# Altium PCB PCB_MicroBot Voltage Regulator V1.pcbdoc
Units mil, origin at the board's own origin, x right, y up, seen from the top; angles counter-clockwise.
Board outline 2029.19 x 3195.07 mil, 2 copper layers (Top Layer, Bottom Layer); 16 components, 16 nets, 37 pads, 0 vias.
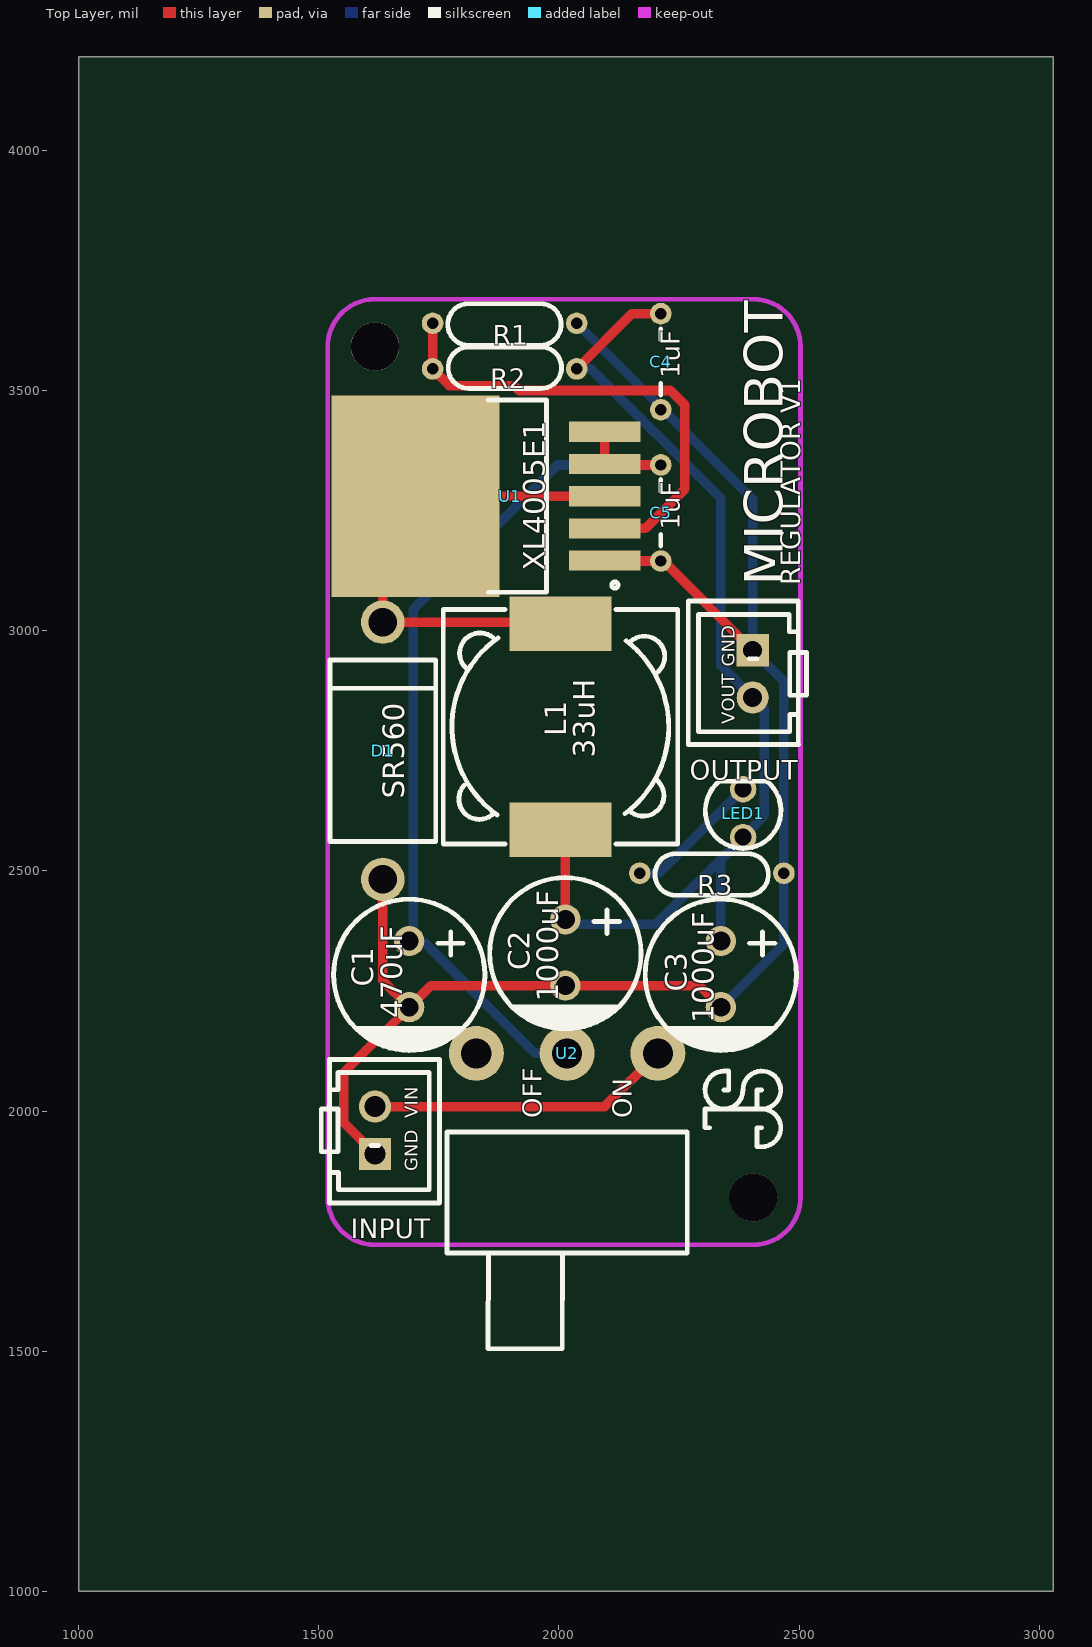
[diagram p0: Top Layer view]
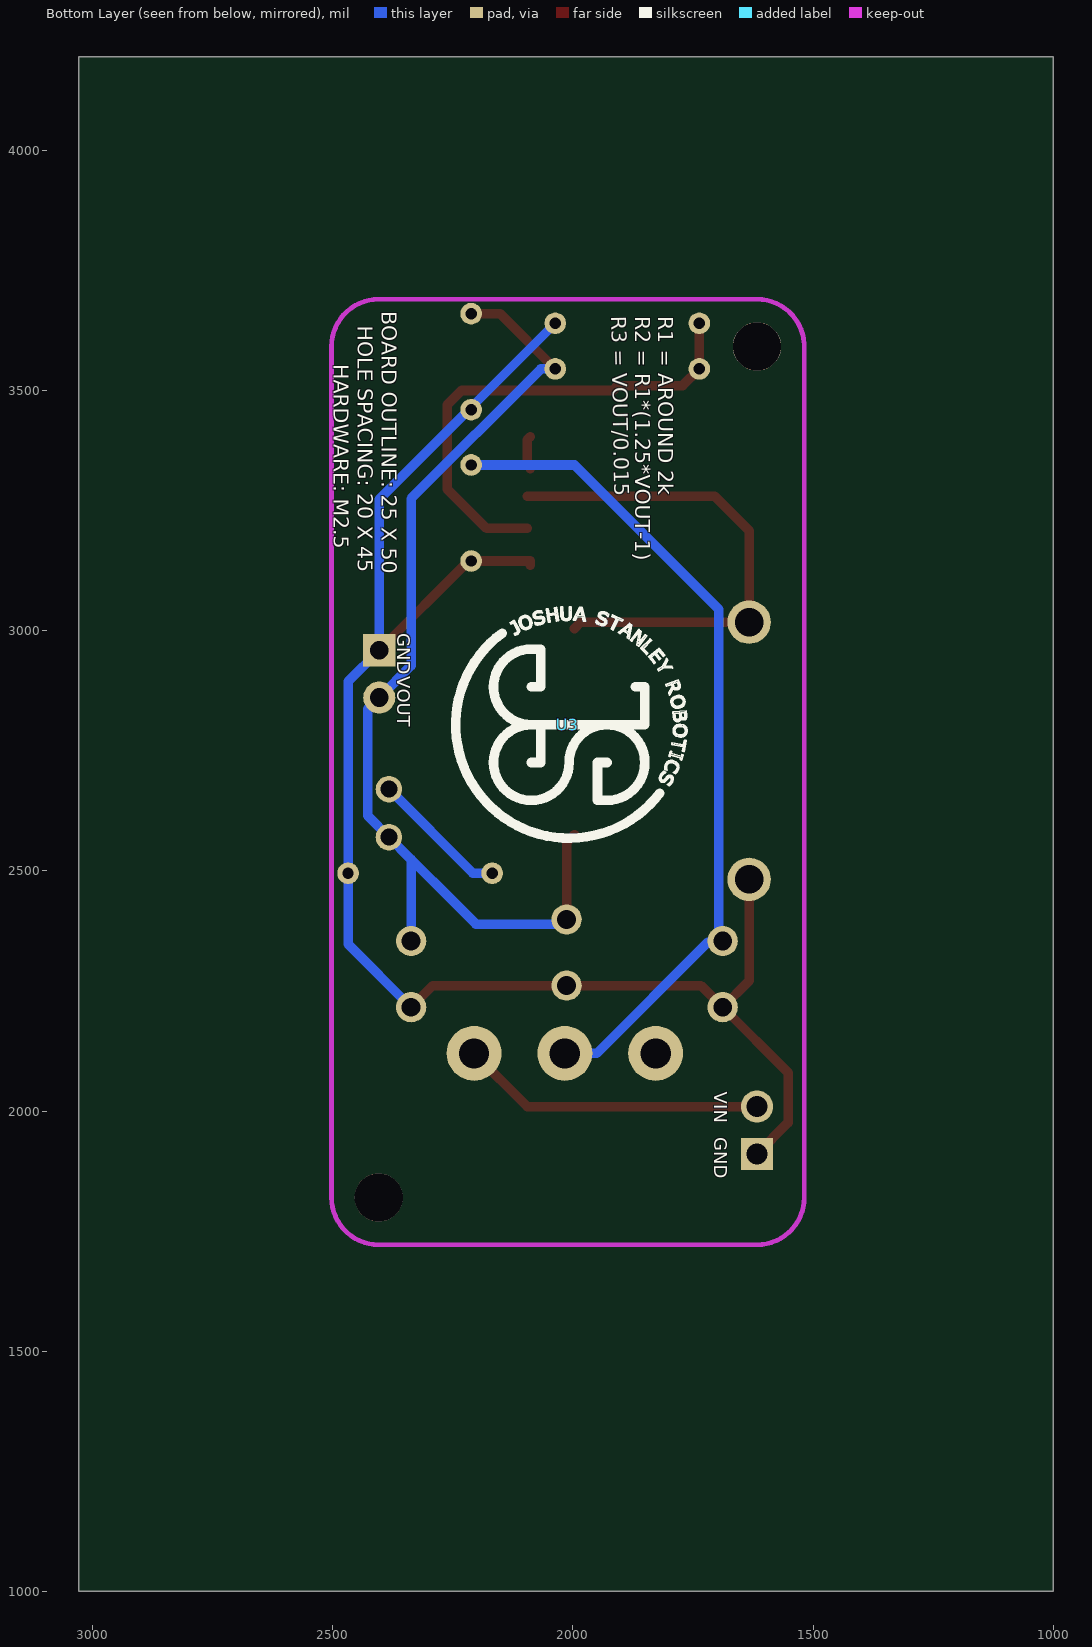
[diagram p1: Bottom Layer view, seen from below]

## Layer stack, top to bottom
Top Layer: signal copper (thickness not stored)
Dielectric: dielectric 12.6, FR-4, Dk 4.8
Bottom Layer: signal copper (thickness not stored)

## Board outline
3029.19,1000 1000,1000 1000,4195.07 3029.19,4195.07

## Components (designator, comment, footprint, x,y, rotation, side; value= is the part's Value field where it differs from the comment)
C1 "470uF" CAP-D8.0×F3.5 1688.27,2284.98 r270 top
C2 "1000uF" CAP-D8.0×F3.5 2013.27,2329.98 r270 top
C3 "1000uF" CAP-D8.0×F3.5 2336.95,2285 r270 top
C4 "1uF" "CERAMIC CAPACITOR" 2211.95,3660 r270 top
C5 "1uF" "CERAMIC CAPACITOR" 2211.95,3145 r90 top
D1 "SR560" DO-27_BD5.3-L8.4-P12.40-D1.3-R-RD 1633.25,2750 r270 top
INPUT "XHB-2A" CONN-TH_XHB-2A#1 1617,1960 r270 top
L1 "33uH" IND-SMD_L12.3-W12.3 2003.25,2800 r90 top
LED1 "LED-TH-3mm_R" LED-TH_BD3.0_RED 2383.25,2620 r180 top
OUTPUT "XHB-2A" CONN-TH_XHB-2A#2 2403.3,2910 r90 top
R1 "3K" "1/4W RESISTOR" 1736.95,3640 r0 top
R2 "16K" "1/4W RESISTOR" 2036.95,3545 r180 top
R3 "330" "1/4W RESISTOR" 2168.25,2495 r0 top
U1 "XL4005E1" TO-263-5_L10.2-W9.2-P1.70-TL 1898.25,3280 r180 top
U2 "SS12D10G5-WJ" SW-TH_3P-SS12D06-1 2016.95,2120 r0 top
U3 "Logo" LOGO 2010.65,2804.2 r90 bottom

## Footprints (in the part's own frame and the unit in brackets; to place one, negate y for a bottom-side part, rotate by r counter-clockwise, add the part's x,y. Pads: shape width x height; smd on the part's side, far side on the other; paste and mask are expansions set on the pad)
"1/4W RESISTOR" [mil]
  round 45 hole 23.62 paste+0 mask+2: 1(0,0) 2(300,0)
  silkscreen extent 32,-46 268,41
CAP-D8.0×F3.5 [mm]
  round 1.6 hole 1 paste+0 mask+0.102: 1(-1.75,0) 2(1.75,0)
  silkscreen extent -3.96,-4 4.04,4
"CERAMIC CAPACITOR" [mil]
  round 45 hole 23.62 paste+0 mask+2: 1(0,0) 2(200,0)
  silkscreen extent 32,0 170,0
CONN-TH_XHB-2A#1 [mm]
  rect 1.7x1.7 hole 1.1 paste+0 mask+0.051: 1(1.251,0)
  round 1.7 hole 1.1 paste+0 mask+0.051: 2(-1.251,0)
  silkscreen extent -3.75,-2.84 3.86,3.4
CONN-TH_XHB-2A#2 [mm]
  rect 1.7x1.7 hole 1 paste+0 mask+0.051: 1(1.251,0)
  round 1.7 hole 1 paste+0 mask+0.051: 2(-1.251,0)
  silkscreen extent -3.75,-2.84 3.86,3.4
DO-27_BD5.3-L8.4-P12.40-D1.3-R-RD [mm]
  round 2.3 hole 1.5 paste+0 mask+0.051: 1(6.8,0) 2(-6.8,0)
  silkscreen extent -4.8,-2.8 4.8,2.8
IND-SMD_L12.3-W12.3 [mm]
  rect 2.9x5.4 smd paste+0 mask+0.051: 1(-5.45,0) 2(5.45,0)
  silkscreen extent -6.2,-6.2 6.2,6.2
LED-TH_BD3.0_RED [mm]
  round 1.4 hole 0.9 paste+0 mask+0.051: 1(0,1.27) 2(0,-1.27)
  silkscreen extent -2,-1.69 2,1.87
LOGO [mil]
  silkscreen extent -236,-248 245,233
SW-TH_3P-SS12D06-1 [mm]
  round 2.9 hole 1.6 paste+0 mask+0.051: 1(-4.8,0) 2(0,0) 3(4.8,0)
  silkscreen extent -6.35,-15.62 6.35,-4.15
TO-263-5_L10.2-W9.2-P1.70-TL [mm]
  rect 3.8x1.069 smd paste+0 mask+0.051: 1(-5.003,3.404) 2(-5.003,1.702) 3(-5.003,0) 4(-5.003,-1.702) 5(-5.003,-3.404)
  rect 8.89x10.66 smd paste+0 mask+0.051: 6(5.002,0)
  silkscreen extent -5.7,-5.08 1.14,5.08

## Free pads (board coordinates)
  round 100.39 hole 100.39 unplated paste+0: ""(1616.95,3591.65) ""(2404.35,1820)

## Nets (pads, with @x,y where several pads share a name; then routed paths per layer and width w, separated by ;. In a path a pad name is that pad's centre, name@x,y a point inside that pad or via, vN(x,y) a via of type N, cw(c..) or ccw(c..) an arc to the next point about the centre after c; other vN are vias at no path point)
D1_2: D1.2 L1.2 U1.3 U1.6 | length 1051.3
  Top Layer w20: L1.2@1996.95,3004.57 1983.8,3017.72 D1.2 1633.25,3208.25 1695,3270 1705,3280 U1.3
GND: C1.2 C2.2 C3.2 C4.2 C5.1 D1.1 INPUT.1 OUTPUT.1 R1.2 R3.2 U1.1 | length 3420.8
  Top Layer w20: INPUT.1@1616.95,1910.7 1551.95,1975.7 1551.95,2079.75 C1.2 ; D1.1 1633.25,2271.1 1688.25,2216.1 1733.65,2261.1 C2.2@2013.25,2261.1 ; C2.2 2291.97,2261.07 C3.2 ; U1.1@2088.95,3136 2088.95,3145 C5.1 2217.55,3145 OUTPUT.1
  Bottom Layer w20: R1.2 2403.25,3273.7 2403.25,2959.3 2468.25,2894.3 R3.2 2468.25,2347.39 C3.2
INPUT_2: INPUT.2 U2.3 | length 634.9
  Top Layer w20: INPUT.2 2095.18,2009.25 U2.3
LED1_2: LED1.2 R3.1 | length 287.5
  Bottom Layer w20: R3.1 2208.25,2495 LED1.2
S$2410: 
S$2414: 
S$2418: 
S$2422: 
S$3064: 
S$3068: 
S$3072: 
S$3076: 
U1_2: R1.1 R2.2 U1.2 | length 1026.8
  Top Layer w20: R1.1 R2.2 1771.95,3510 1906.95,3510 1916.95,3500 2231.95,3500 2261.95,3470 2261.95,3295 2179.95,3213 U1.2
U2_1: U2.1
VIN: C1.1 C5.2 U1.4 U1.5 U2.2 | length 1949.4
  Top Layer w20: U1.5@2088.9,3404 2095.2,3397.7 U1.4 ; U1.4@2088.95,3337 2088.95,3345 C5.2
  Bottom Layer w20: U2.2 1950.55,2120 1718.85,2351.7 1688.25,2353.9 1696.95,2362.5 1696.95,3045 1996.95,3345 C5.2
VOUT: C2.1 C3.1 C4.1 L1.1 LED1.1 OUTPUT.2 R2.1 | length 2264.6
  Top Layer w20: L1.1@1996.95,2575.43 2013.27,2559.11 C2.1 ; R2.1 2151.95,3660 C4.1
  Bottom Layer w20: C2.1@2006.95,2388.9 2202.15,2388.9 LED1.1 ; R2.1 2066.95,3545 2336.95,3275 2336.95,2927.1 2403.25,2860.7 2426.95,2837.1 2426.95,2614.4 LED1.1 ; C3.1 2336.95,2523.7 LED1.1

## Keep-outs
Keep-Out Layer:
  lines w10 net S$2410: 1518.53,1820 ccw(c1616.95,1820) 1616.95,1721.58
  lines w10 net S$2414: 2404.35,1721.58 ccw(c2404.35,1820) 2502.78,1820
  lines w10 net S$2418: 2404.35,3690.08 cw(c2404.35,3591.65) 2502.78,3591.65
  lines w10 net S$2422: 1518.66,3586.5 cw(c1616.95,3591.65) 1616.95,3690.07

## Silkscreen, mask and mechanical layers (free items; w line width, h text height)
Top Overlay:
  lines w10: 2314,1965 2304.16,1965 2304.16,2004.37 2422.26,2004.37 ; 2343.53,2043.74 2353.37,2043.74 2353.37,2083.11 2343.53,2083.11 ccw(c2343.53,2043.74) 2382.89,2043.74 cw(c2422.26,2043.74) 2422.26,2004.37 ; 2412.43,2004.37 2412.43,2043.74 2422.26,2043.74 ; 2422.26,1965 2412.43,1965 2412.43,1925.63 2422.26,1925.63 ccw(c2422.26,1965) 2422.26,2004.37
  text "REGULATOR V1" at 2501.95,3095 h40 r90
  text "MICROBOT" at 2466.31,3093.31 h80 r90
  text "GND" at 2365.73,2925 h27.56 r90
  text "VOUT" at 2365.73,2805 h27.56 r90
  text "VIN" at 1705.73,1985 h27.56 r90
  text "OFF" at 1964.43,1985 h39.37 r90
  text "ON" at 2151.84,1985 h39.37 r90
  text "GND" at 1705.73,1875 h27.56 r90
Bottom Overlay:
  text "BOARD OUTLINE: 25 X 50" at 2397.7,3665 h31.5 r90
  text "R1 = AROUND 2k" at 1822.3,3654.8 h31.5 r90
  text "R2 = R1*(1.25*VOUT-1)" at 1870.3,3655 h31.5 r90
  text "R3 = VOUT/0.015" at 1920.3,3654.73 h31.5 r89
  text "HOLE SPACING: 20 X 45" at 2447.7,3635 h31.5 r90
  text "HARDWARE: M2.5" at 2497.7,3555 h31.5 r90
  text "GND" at 2365.73,2995 h27.56 r90
  text "VOUT" at 2365.73,2905 h27.56 r90
  text "VIN" at 1705.73,2040 h27.56 r90
  text "GND" at 1705.73,1945 h27.56 r90